# Altium PCB pcb.PcbDoc (part 4 of 6)
Units mm, origin at the board's own origin, x right, y up, seen from the top; angles counter-clockwise.
Board outline 85.44 x 182.72 mm, 2 copper layers (Top Layer, Bottom Layer); 68 components, 54 nets, 232 pads, 184 vias.
Unrouted connection lines stored in the file: 53.
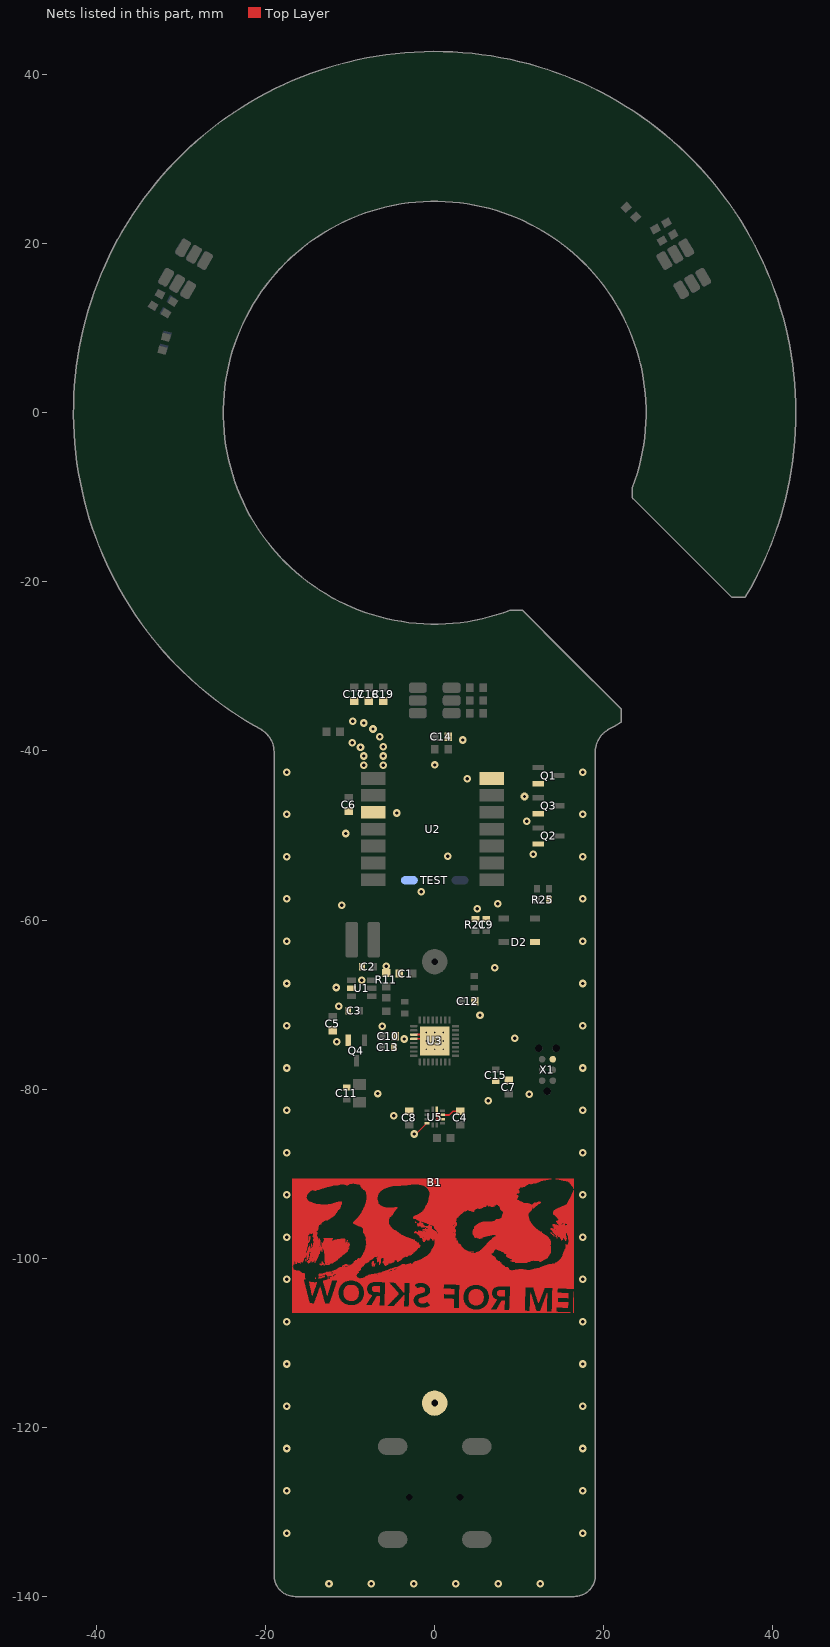
[diagram p4: the nets of this part, all layers, seen from the top]

## Via types
v1: diameter 0.9, hole 0.4, Top Layer to Bottom Layer, 143 vias
v2: diameter 1.27, hole 0.7, Top Layer to Bottom Layer, 32 vias
v3: diameter 0.5, hole 0.2, Top Layer to Bottom Layer, 9 vias

## Nets (pads, with @x,y where several pads share a name; then routed paths per layer and width w, separated by ;. In a path a pad name is that pad's centre, name@x,y a point inside that pad or via, vN(x,y) a via of type N, cw(c..) or ccw(c..) an arc to the next point about the centre after c; other vN are vias at no path point) (continued)
GND: (continued)
  Top Layer w0.025: -4.618,-102.886 -3.577,-102.886 ; -4.593,-105.401 -3.653,-105.401 ; -4.593,-102.911 -3.577,-102.911 ; -4.593,-100.143 -4.542,-100.143 ; -4.593,-100.117 -4.008,-100.117 ; -4.593,-100.092 -3.983,-100.092 ; -4.567,-105.375 -3.653,-105.375 ; -4.567,-102.937 -3.577,-102.937 ; -4.542,-105.35 -3.653,-105.35 ; -4.542,-102.962 -3.577,-102.962 ; -4.542,-101.337 8.819,-101.337 ; -4.542,-101.235 -4.212,-101.235 ; -4.516,-105.324 -3.653,-105.324 ; -4.516,-102.988 -3.577,-102.988 ; -4.516,-101.311 8.768,-101.311 ; -4.516,-101.286 8.717,-101.286 ; -4.516,-101.26 8.692,-101.26 ; -4.491,-105.299 -3.653,-105.299 ; -4.491,-103.013 -3.577,-103.013 ; -4.491,-101.083 8.387,-101.083 ; -4.491,-101.057 8.361,-101.057 ; -4.466,-105.274 -3.653,-105.274 ; -4.466,-103.064 -3.577,-103.064 ; -4.466,-103.038 -3.577,-103.038 ; -4.466,-101.108 -4.415,-101.108 ; -4.466,-100.143 -4.034,-100.143 ; -4.44,-105.248 -3.653,-105.248 ; -4.44,-103.089 -3.577,-103.089 ; -4.44,-101.032 8.336,-101.032 ; -4.415,-105.223 -3.653,-105.223 ; -4.415,-103.115 -3.577,-103.115 ; -4.415,-100.371 -4.389,-100.371 ; -4.415,-100.346 -4.364,-100.346 ; -4.415,-100.321 -4.339,-100.321 ; -4.415,-100.295 -4.288,-100.295 ; -4.415,-100.27 -4.237,-100.27 ; -4.415,-100.168 -4.059,-100.168 ; -4.389,-105.197 -3.653,-105.197 ; -4.389,-103.14 -3.577,-103.14 ; -4.389,-101.108 8.412,-101.108 ; -4.389,-100.244 -4.186,-100.244 ; -4.389,-100.194 -4.085,-100.194 ; -4.364,-105.172 -3.653,-105.172 ; -4.364,-103.165 -3.577,-103.165 ; -4.364,-101.006 8.311,-101.006 ; -4.364,-100.219 -4.135,-100.219 ; -4.339,-105.147 -3.653,-105.147 ; -4.339,-105.121 -3.653,-105.121 ; -4.339,-103.191 -3.577,-103.191 ; -4.339,-101.133 -4.313,-101.133 ; -4.313,-105.096 -3.653,-105.096 ; -4.313,-103.242 -3.577,-103.242 ; -4.313,-103.216 -3.577,-103.216 ; -4.313,-100.981 8.285,-100.981 ; -4.288,-105.07 -3.653,-105.07 ; -4.288,-103.267 -3.577,-103.267 ; -4.262,-105.045 -3.653,-105.045 ; -4.262,-103.292 -3.577,-103.292 ; -4.262,-100.956 8.285,-100.956 ; -4.237,-105.02 -3.653,-105.02 ; -4.237,-103.318 -3.577,-103.318 ; -4.212,-104.994 -3.653,-104.994 ; -4.212,-103.343 -3.577,-103.343 ; -4.212,-100.93 8.26,-100.93 ; -4.186,-104.969 -3.627,-104.969 ; -4.186,-103.369 -3.577,-103.369 ; -4.186,-101.235 8.641,-101.235 ; -4.186,-101.21 8.59,-101.21 ; -4.186,-101.184 8.539,-101.184 ; -4.186,-101.159 8.488,-101.159 ; -4.186,-101.133 8.463,-101.133 ; -4.161,-104.943 -3.627,-104.943 ; -4.161,-103.394 -3.577,-103.394 ; -4.161,-100.905 8.234,-100.905 ; -4.135,-104.918 -3.627,-104.918 ; -4.135,-103.445 -3.577,-103.445 ; -4.135,-103.419 -3.577,-103.419 ; -4.135,-100.879 8.209,-100.879 ; -4.11,-104.893 -3.627,-104.893 ; -4.11,-103.47 -3.577,-103.47 ; -4.085,-104.867 -3.627,-104.867 ; -4.085,-103.496 -3.577,-103.496 ; -4.085,-100.854 8.158,-100.854 ; -4.059,-104.842 -3.627,-104.842 ; -4.059,-104.816 -3.627,-104.816 ; -4.059,-103.521 -3.602,-103.521 ; -4.034,-104.791 -3.627,-104.791 ; -4.034,-103.546 -3.602,-103.546 ; -4.034,-100.829 8.133,-100.829 ; -4.008,-104.766 -3.627,-104.766 ; -4.008,-103.572 -3.602,-103.572 ; -3.983,-104.74 -3.627,-104.74 ; -3.983,-103.597 -3.602,-103.597 ; -3.983,-100.803 8.082,-100.803 ; -3.958,-104.715 -3.627,-104.715 ; -3.958,-103.648 -3.602,-103.648 ; -3.958,-103.623 -3.602,-103.623 ; -3.958,-100.778 8.031,-100.778 ; -3.932,-104.689 -3.627,-104.689 ; -3.932,-103.673 -3.602,-103.673 ; -3.907,-104.664 -3.627,-104.664 ; -3.907,-103.699 -3.602,-103.699 ; -3.907,-100.752 -3.526,-100.752 ; -3.881,-104.639 -3.627,-104.639 ; -3.881,-103.724 -3.602,-103.724 ; -3.856,-104.613 -3.627,-104.613 ; -3.856,-103.75 -3.602,-103.75 ; -3.856,-100.727 -3.551,-100.727 ; -3.831,-104.588 -3.627,-104.588 ; -3.831,-103.775 -3.602,-103.775 ; -3.805,-104.562 -3.627,-104.562 ; -3.805,-103.8 -3.602,-103.8 ; -3.805,-100.702 -3.551,-100.702 ; -3.78,-104.537 -3.627,-104.537 ; -3.78,-103.851 -3.602,-103.851 ; -3.78,-103.826 -3.602,-103.826 ; -3.754,-104.512 -3.627,-104.512 ; -3.754,-104.486 -3.627,-104.486 ; -3.754,-103.877 -3.602,-103.877 ; -3.729,-104.461 -3.627,-104.461 ; -3.729,-103.902 -3.602,-103.902 ; -3.704,-104.435 -3.627,-104.435 ; -3.704,-103.927 -3.602,-103.927 ; -3.678,-104.41 -3.627,-104.41 ; -3.678,-103.953 -3.602,-103.953 ; -3.653,-104.385 -3.627,-104.385 ; -3.653,-103.978 -3.602,-103.978 ; -3.627,-104.004 -3.602,-104.004 ; -3.627,-100.676 -3.577,-100.676 ; -3.424,-100.752 8.006,-100.752 ; -3.348,-99.762 -3.323,-99.762 ; -3.348,-99.736 -3.297,-99.736 ; -3.348,-99.711 -3.246,-99.711 ; -3.323,-100.727 7.955,-100.727 ; -3.297,-102.861 -1.824,-102.861 ; -3.297,-99.787 -3.272,-99.787 ; -3.246,-100.702 7.93,-100.702 ; -3.196,-100.676 7.879,-100.676 ; -3.094,-100.651 -2.764,-100.651 ; -3.043,-105.705 -2.053,-105.705 ; -3.043,-105.68 -2.103,-105.68 ; -3.043,-105.655 -2.129,-105.655 ; -3.043,-105.629 -2.18,-105.629 ; -3.043,-105.604 -2.205,-105.604 ; -3.043,-105.578 -2.23,-105.578 ; -3.043,-105.553 -2.256,-105.553 ; -3.018,-105.528 -2.281,-105.528 ; -3.018,-105.502 -2.307,-105.502 ; -3.018,-105.477 -2.332,-105.477 ; -3.018,-105.451 -2.357,-105.451 ; -3.018,-105.426 -2.357,-105.426 ; -3.018,-105.401 -2.383,-105.401 ; -3.018,-105.375 -2.408,-105.375 ; -3.018,-105.35 -2.408,-105.35 ; -3.018,-105.324 -2.434,-105.324 ; -3.018,-105.299 -2.434,-105.299 ; -3.018,-105.274 -2.459,-105.274 ; -3.018,-105.248 -2.459,-105.248 ; -3.018,-105.223 -2.459,-105.223 ; -3.018,-105.197 -2.484,-105.197 ; -3.018,-105.172 -2.484,-105.172 ; -3.018,-105.147 -2.484,-105.147 ; -3.018,-105.121 -2.484,-105.121 ; -3.018,-105.096 -2.51,-105.096 ; -3.018,-105.07 -2.51,-105.07 ; -3.018,-105.045 -2.51,-105.045 ; -3.018,-105.02 -2.51,-105.02 ; -3.018,-104.994 -2.51,-104.994 ; -3.018,-104.969 -2.51,-104.969 ; -3.018,-104.943 -2.51,-104.943 ; -3.018,-104.918 -2.51,-104.918 ; -3.018,-104.893 -2.51,-104.893 ; -3.018,-104.867 -2.51,-104.867 ; -3.018,-104.842 -2.51,-104.842 ; -3.018,-104.816 -2.51,-104.816 ; -2.992,-104.791 -2.51,-104.791 ; -2.992,-104.766 -2.51,-104.766 ; -2.992,-104.74 -2.51,-104.74 ; -2.992,-104.715 -2.484,-104.715 ; -2.992,-104.689 -2.484,-104.689 ; -2.992,-104.664 -2.484,-104.664 ; -2.992,-104.639 -2.484,-104.639 ; -2.992,-104.613 -2.459,-104.613 ; -2.992,-104.588 -2.459,-104.588 ; -2.992,-104.562 -2.459,-104.562 ; -2.992,-104.537 -2.434,-104.537 ; -2.992,-104.512 -2.434,-104.512 ; -2.992,-104.486 -2.408,-104.486 ; -2.992,-104.461 -2.383,-104.461 ; -2.992,-104.435 -2.357,-104.435 ; -2.992,-104.41 -2.357,-104.41 ; -2.992,-104.385 -2.332,-104.385 ; -2.992,-104.359 -2.307,-104.359 ; -2.992,-104.334 -2.256,-104.334 ; -2.992,-104.308 -2.23,-104.308 ; -2.992,-104.283 -2.205,-104.283 ; -2.992,-104.258 -2.154,-104.258 ; -2.992,-104.232 -2.103,-104.232 ; -2.992,-104.207 -2.053,-104.207 ; -2.992,-104.181 -2.002,-104.181 ; -2.992,-104.156 -1.926,-104.156 ; -2.992,-104.131 -1.849,-104.131 ; -2.992,-104.105 -1.748,-104.105 ; -2.967,-104.08 -1.646,-104.08 ; -2.967,-104.054 -1.57,-104.054 ; -2.967,-104.029 -1.468,-104.029 ; -2.967,-104.004 -1.392,-104.004 ; -2.967,-103.978 -1.341,-103.978 ; -2.967,-103.953 -1.291,-103.953 ; -2.967,-103.927 -1.265,-103.927 ; -2.967,-103.902 -1.214,-103.902 ; -2.967,-103.877 -1.214,-103.877 ; -2.967,-103.851 -1.189,-103.851 ; -2.967,-103.826 -1.189,-103.826 ; -2.967,-103.8 -1.164,-103.8 ; -2.967,-103.775 -1.164,-103.775 ; -2.967,-103.75 -1.164,-103.75 ; -2.967,-103.724 -1.164,-103.724 ; -2.967,-103.699 -1.164,-103.699 ; -2.967,-103.673 -1.164,-103.673 ; -2.967,-103.648 -1.164,-103.648 ; -2.967,-103.623 -1.189,-103.623 ; -2.967,-103.597 -1.189,-103.597 ; -2.967,-103.572 -2.053,-103.572 ; -2.967,-103.546 -2.078,-103.546 ; -2.967,-103.521 -2.103,-103.521 ; -2.967,-103.496 -2.129,-103.496 ; -2.967,-103.47 -2.154,-103.47 ; -2.967,-103.445 -2.18,-103.445 ; -2.967,-103.419 -2.18,-103.419 ; -2.967,-103.394 -2.205,-103.394 ; -2.967,-103.369 -2.23,-103.369 ; -2.942,-103.343 -2.256,-103.343 ; -2.942,-103.318 -2.281,-103.318 ; -2.942,-103.292 -2.307,-103.292 ; -2.942,-103.267 -2.332,-103.267 ; -2.942,-103.242 -2.332,-103.242 ; -2.942,-103.216 -2.357,-103.216 ; -2.942,-103.191 -2.383,-103.191 ; -2.942,-103.165 -2.408,-103.165 ; -2.942,-103.14 -2.434,-103.14 ; -2.942,-103.115 -2.434,-103.115 ; -2.942,-103.089 -2.408,-103.089 ; -2.942,-103.064 -2.383,-103.064 ; -2.942,-103.038 -2.332,-103.038 ; -2.942,-103.013 -2.307,-103.013 ; -2.942,-102.988 -2.256,-102.988 ; -2.942,-102.962 -2.205,-102.962 ; -2.942,-102.937 -2.154,-102.937 ; -2.942,-102.911 -2.078,-102.911 ; -2.942,-102.886 -1.976,-102.886 ; -2.942,-100.625 -2.789,-100.625 ; -2.916,-99.559 -2.84,-99.559 ; -2.865,-100.6 -2.815,-100.6 ; -2.637,-100.651 7.879,-100.651 ; -2.586,-100.625 7.853,-100.625 ; -2.535,-100.6 7.879,-100.6 ; -2.535,-95.19 2.596,-95.19 ; -2.535,-95.164 2.621,-95.164 ; -2.535,-95.139 2.672,-95.139 ; -2.51,-100.575 7.879,-100.575 ; -2.51,-100.549 7.853,-100.549 ; -2.51,-95.215 2.596,-95.215 ; -2.51,-95.114 2.773,-95.114 ; -2.484,-100.524 7.828,-100.524 ; -2.484,-100.498 7.777,-100.498 ; -2.484,-100.473 7.752,-100.473 ; -2.484,-95.241 2.57,-95.241 ; -2.484,-95.088 2.773,-95.088 ; -2.459,-100.448 7.726,-100.448 ; -2.459,-95.063 2.799,-95.063 ; -2.434,-98.06 -2.154,-98.06 ; -2.434,-96.892 -2.18,-96.892 ; -2.434,-95.266 2.57,-95.266 ; -2.408,-100.422 7.701,-100.422 ; -2.408,-96.942 -2.256,-96.942 ; -2.408,-96.917 -2.205,-96.917 ; -2.408,-95.037 2.799,-95.037 ; -2.383,-98.035 -2.18,-98.035 ; -2.383,-96.993 -2.332,-96.993 ; -2.383,-96.968 -2.307,-96.968 ; -2.383,-95.012 2.799,-95.012 ; -2.357,-100.397 7.701,-100.397 ; -2.357,-94.987 2.824,-94.987 ; -2.332,-98.009 -2.205,-98.009 ; -2.332,-96.866 -2.18,-96.866 ; -2.307,-100.371 7.676,-100.371 ; -2.307,-96.841 -2.18,-96.841 ; -2.307,-96.815 -2.205,-96.815 ; -2.307,-95.698 -2.23,-95.698 ; -2.307,-94.961 2.85,-94.961 ; -2.281,-96.79 -2.23,-96.79 ; -2.281,-95.723 -2.154,-95.723 ; -2.256,-95.749 -2.154,-95.749 ; -2.256,-95.291 2.57,-95.291 ; -2.256,-94.936 2.85,-94.936 ; -2.23,-100.346 7.599,-100.346 ; -2.205,-95.774 -2.18,-95.774 ; -2.205,-95.317 2.57,-95.317 ; -2.205,-94.91 2.875,-94.91 ; -2.154,-100.321 7.523,-100.321 ; -2.154,-96.993 -1.164,-96.993 ; -2.154,-96.968 -1.24,-96.968 ; -2.154,-95.342 2.57,-95.342 ; -2.129,-96.942 -1.24,-96.942 ; -2.129,-95.368 2.57,-95.368 ; -2.129,-94.885 2.9,-94.885 ; -2.103,-96.917 -1.214,-96.917 ; -2.103,-96.892 -1.265,-96.892 ; -2.078,-100.295 7.472,-100.295 ; -2.078,-97.019 -0.833,-97.019 ; -2.078,-96.003 -1.875,-96.003 ; -2.078,-95.977 -1.849,-95.977 ; -2.078,-95.952 -1.799,-95.952 ; -2.078,-95.926 -1.367,-95.926 ; -2.078,-95.393 2.57,-95.393 ; -2.078,-94.86 2.926,-94.86 ; -2.053,-96.028 -1.9,-96.028 ; -2.053,-95.901 -1.367,-95.901 ; -2.027,-97.12 0.31,-97.12 ; -2.027,-96.053 -1.875,-96.053 ; -2.027,-95.876 -2.002,-95.876 ; -2.027,-95.418 2.57,-95.418 ; -2.027,-91.202 11.003,-91.202 ; -2.002,-103.572 -1.214,-103.572 ; -2.002,-100.27 -1.926,-100.27 ; -2.002,-96.104 -1.824,-96.104 ; -2.002,-96.079 -1.849,-96.079 ; -2.002,-94.834 2.951,-94.834 ; -1.976,-103.546 -1.24,-103.546 ; -1.976,-97.146 0.31,-97.146 ; -1.976,-96.13 -1.824,-96.13 ; -1.976,-95.444 2.545,-95.444 ; -1.951,-103.521 -1.265,-103.521 ; -1.951,-98.644 -1.773,-98.644 ; -1.951,-97.171 0.411,-97.171 ; -1.951,-97.044 -0.783,-97.044 ; -1.951,-96.739 -1.799,-96.739 ; -1.951,-96.714 -1.799,-96.714 ; -1.951,-94.809 2.977,-94.809 ; -1.926,-98.695 -1.824,-98.695 ; -1.926,-98.67 -1.799,-98.67 ; -1.926,-97.095 0.284,-97.095 ; -1.926,-96.79 -1.824,-96.79 ; -1.926,-96.765 -1.824,-96.765 ; -1.926,-96.155 -1.799,-96.155 ; -1.926,-95.469 2.545,-95.469 ; -1.9,-104.969 2.265,-104.969 ; -1.9,-103.496 -1.316,-103.496 ; -1.9,-98.72 -1.875,-98.72 ; -1.9,-97.196 0.437,-97.196 ; -1.9,-96.815 -1.545,-96.815 ; -1.9,-95.495 2.367,-95.495 ; -1.9,-94.783 3.027,-94.783 ; -1.875,-105.07 -0.96,-105.07 ; -1.875,-105.045 -0.935,-105.045 ; -1.875,-105.02 2.265,-105.02 ; -1.875,-104.994 2.265,-104.994 ; -1.875,-104.943 2.265,-104.943 ; -1.875,-104.918 2.265,-104.918 ; -1.875,-104.893 2.265,-104.893 ; -1.875,-104.867 2.265,-104.867 ; -1.875,-100.27 7.447,-100.27 ; -1.875,-100.244 7.422,-100.244 ; -1.875,-97.069 -0.757,-97.069 ; -1.875,-96.866 -1.341,-96.866 ; -1.875,-96.841 -1.519,-96.841 ; -1.875,-95.876 -1.443,-95.876 ; -1.875,-95.52 2.342,-95.52 ; -1.849,-105.096 -0.986,-105.096 ; -1.849,-104.842 2.265,-104.842 ; -1.849,-104.816 2.265,-104.816 ; -1.849,-100.219 7.371,-100.219 ; -1.849,-100.194 -1.824,-100.194 ; -1.849,-97.222 0.437,-97.222 ; -1.849,-95.85 -1.468,-95.85 ; -1.849,-95.825 -1.494,-95.825 ; -1.849,-94.758 3.053,-94.758 ; -1.824,-105.147 -1.037,-105.147 ; -1.824,-105.121 -1.011,-105.121 ; -1.824,-104.791 2.062,-104.791 ; -1.824,-103.47 -1.367,-103.47 ; -1.824,-94.733 3.078,-94.733 ; -1.824,-91.227 10.978,-91.227 ; -1.799,-104.766 1.326,-104.766 ; -1.799,-97.247 2.443,-97.247 ; -1.799,-96.079 -1.341,-96.079 ; -1.773,-105.172 -1.087,-105.172 ; -1.773,-98.441 -1.748,-98.441 ; -1.773,-97.45 -1.468,-97.45 ; -1.773,-97.425 -1.57,-97.425 ; -1.773,-97.4 -1.621,-97.4 ; -1.773,-96.053 -1.341,-96.053 ; -1.773,-95.545 2.342,-95.545 ; -1.773,-94.707 3.104,-94.707 ; -1.748,-105.197 -1.113,-105.197 ; -1.748,-104.74 1.072,-104.74 ; -1.748,-97.476 -1.443,-97.476 ; -1.748,-97.273 2.418,-97.273 ; -1.748,-95.672 -1.722,-95.672 ; -1.748,-94.682 3.129,-94.682 ; -1.722,-103.445 -1.468,-103.445 ; -1.722,-100.194 7.345,-100.194 ; -1.722,-97.501 -1.418,-97.501 ; -1.722,-96.79 -1.595,-96.79 ; -1.722,-96.714 -1.697,-96.714 ; -1.722,-95.698 -1.646,-95.698 ; -1.697,-105.223 -1.189,-105.223 ; -1.697,-104.715 1.072,-104.715 ; -1.697,-97.527 -1.392,-97.527 ; -1.697,-97.298 2.418,-97.298 ; -1.697,-95.952 -1.341,-95.952 ; -1.697,-94.656 3.18,-94.656 ; -1.672,-96.104 -1.316,-96.104 ; -1.672,-95.977 -1.341,-95.977 ; -1.672,-94.631 3.205,-94.631 ; -1.672,-91.253 10.952,-91.253 ; -1.646,-104.689 1.072,-104.689 ; -1.646,-100.168 7.32,-100.168 ; -1.646,-97.323 2.418,-97.323 ; -1.621,-105.248 -1.265,-105.248 ; -1.621,-100.143 7.269,-100.143 ; -1.621,-96.206 -1.595,-96.206 ; -1.621,-96.13 -1.341,-96.13 ; -1.621,-96.028 -1.341,-96.028 ; -1.621,-96.003 -1.341,-96.003 ; -1.621,-95.571 2.342,-95.571 ; -1.621,-94.606 3.231,-94.606 ; -1.595,-104.664 1.097,-104.664 ; -1.595,-96.231 -1.468,-96.231 ; -1.595,-94.58 3.256,-94.58 ; -1.57,-100.117 7.244,-100.117 ; -1.57,-97.349 2.392,-97.349 ; -1.57,-96.257 -1.392,-96.257 ; -1.57,-96.155 -1.418,-96.155 ; -1.57,-94.555 3.281,-94.555 ; -1.545,-100.092 7.218,-100.092 ; -1.545,-94.529 3.332,-94.529 ; -1.545,-91.278 10.901,-91.278 ; -1.519,-104.639 1.097,-104.639 ; -1.519,-97.374 2.392,-97.374 ; -1.519,-95.596 2.342,-95.596 ; -1.494,-100.067 7.218,-100.067 ; -1.494,-94.504 3.358,-94.504 ; -1.468,-97.628 -1.392,-97.628 ; -1.468,-94.479 3.383,-94.479 ; -1.443,-104.613 1.097,-104.613 ; -1.443,-100.041 7.244,-100.041 ; -1.443,-97.806 -1.392,-97.806 ; -1.443,-97.781 -1.418,-97.781 ; -1.443,-97.679 -1.011,-97.679 ; -1.443,-97.654 -0.935,-97.654 ; -1.443,-97.4 -0.198,-97.4 ; -1.443,-95.622 2.342,-95.622 ; -1.443,-94.453 3.408,-94.453 ; -1.443,-91.304 10.851,-91.304 ; -1.418,-102.861 16.464,-102.861 ; -1.418,-100.016 7.244,-100.016 ; -1.418,-97.831 -1.367,-97.831 ; -1.418,-97.704 -1.011,-97.704 ; -1.418,-94.428 3.459,-94.428 ; -1.392,-97.857 -1.341,-97.857 ; -1.392,-97.73 -1.011,-97.73 ; -1.392,-97.425 -0.198,-97.425 ; -1.392,-96.765 -1.341,-96.765 ; -1.392,-96.612 -1.113,-96.612 ; -1.392,-96.587 -1.189,-96.587 ; -1.392,-96.282 -1.214,-96.282 ; -1.392,-94.402 3.485,-94.402 ; -1.367,-99.99 7.218,-99.99 ; -1.367,-97.933 -1.164,-97.933 ; -1.367,-97.908 -1.265,-97.908 ; -1.367,-97.882 -1.291,-97.882 ; -1.367,-97.628 -0.935,-97.628 ; -1.367,-96.79 -1.24,-96.79 ; -1.367,-96.561 -1.265,-96.561 ; -1.367,-95.647 2.367,-95.647 ; -1.367,-94.377 3.637,-94.377 ; -1.367,-91.329 10.825,-91.329 ; -1.341,-104.588 1.097,-104.588 ; -1.341,-97.958 -1.164,-97.958 ; -1.341,-97.755 -1.087,-97.755 ; -1.341,-97.603 -0.757,-97.603 ; -1.341,-96.257 -1.164,-96.257 ; -1.341,-94.352 3.688,-94.352 ; -1.316,-99.965 7.218,-99.965 ; -1.316,-97.984 -1.164,-97.984 ; -1.316,-97.781 -1.087,-97.781 ; -1.316,-97.577 -0.757,-97.577 ; -1.316,-97.45 -0.859,-97.45 ; -1.316,-95.672 2.469,-95.672 ; -1.316,-94.326 3.739,-94.326 ; -1.316,-91.354 10.774,-91.354 ; -1.291,-102.886 16.464,-102.886 ; -1.291,-99.94 7.168,-99.94 ; -1.291,-97.806 -1.087,-97.806 ; -1.291,-97.552 -0.783,-97.552 ; -1.291,-96.231 -0.325,-96.231 ; -1.291,-96.155 -1.24,-96.155 ; -1.291,-94.301 3.764,-94.301 ; -1.291,-94.275 3.815,-94.275 ; -1.265,-104.562 1.097,-104.562 ; -1.265,-98.009 -1.164,-98.009 ; -1.265,-97.831 -1.113,-97.831 ; -1.265,-97.527 -0.833,-97.527 ; -1.265,-97.501 -0.833,-97.501 ; -1.265,-97.476 -0.859,-97.476 ; -1.265,-96.206 -1.011,-96.206 ; -1.265,-96.18 -1.164,-96.18 ; -1.265,-94.25 3.84,-94.25 ; -1.24,-99.914 7.142,-99.914 ; -1.24,-97.882 -1.138,-97.882 ; -1.24,-97.857 -1.138,-97.857 ; -1.24,-96.815 -1.164,-96.815 ; -1.24,-96.638 -1.011,-96.638 ; -1.24,-95.698 2.443,-95.698 ; -1.24,-94.225 3.891,-94.225 ; -1.24,-91.38 10.749,-91.38 ; -1.214,-99.889 7.117,-99.889 ; -1.214,-97.908 -1.164,-97.908 ; -1.214,-94.199 4.704,-94.199 ; -1.214,-94.174 4.755,-94.174 ; -1.189,-102.911 16.464,-102.911 ; -1.189,-96.841 -1.087,-96.841 ; -1.189,-94.148 4.805,-94.148 ; -1.189,-94.123 4.856,-94.123 ; -1.189,-91.405 10.724,-91.405 ; -1.164,-104.537 1.097,-104.537 ; -1.164,-99.863 7.091,-99.863 ; -1.164,-96.866 -0.986,-96.866 ; -1.164,-96.663 -0.122,-96.663 ; -1.164,-95.723 2.443,-95.723 ; -1.164,-94.098 4.907,-94.098 ; -1.164,-94.072 4.958,-94.072 ; -1.164,-91.431 10.698,-91.431 ; -1.138,-96.892 -0.935,-96.892 ; -1.138,-96.511 -1.011,-96.511 ; -1.138,-96.485 -1.037,-96.485 ; -1.138,-96.46 -1.062,-96.46 ; -1.138,-94.047 4.983,-94.047 ; -1.138,-94.021 5.517,-94.021 ; -1.138,-93.996 5.567,-93.996 ; -1.113,-105.832 2.24,-105.832 ; -1.113,-102.937 16.464,-102.937 ; -1.113,-99.838 7.066,-99.838 ; -1.113,-96.917 -0.935,-96.917 ; -1.113,-96.536 -0.986,-96.536 ; -1.113,-93.971 5.618,-93.971 ; -1.113,-93.945 5.034,-93.945 ; -1.113,-93.92 5.034,-93.92 ; -1.113,-91.456 10.673,-91.456 ; -1.087,-104.512 1.097,-104.512 ; -1.087,-96.993 -0.884,-96.993 ; -1.087,-96.942 -0.91,-96.942 ; -1.087,-96.688 -0.071,-96.688 ; -1.087,-93.894 5.745,-93.894 ; -1.087,-93.869 4.678,-93.869 ; -1.062,-102.962 16.464,-102.962 ; -1.062,-99.813 7.041,-99.813 ; -1.062,-96.968 -0.91,-96.968 ; -1.062,-96.561 -0.91,-96.561 ; -1.062,-96.257 -0.351,-96.257 ; -1.062,-95.749 2.418,-95.749 ; -1.062,-93.844 6.05,-93.844 ; -1.062,-93.818 6.05,-93.818 ; -1.062,-91.481 10.622,-91.481 ; -1.037,-96.714 -0.046,-96.714 ; -1.037,-93.793 5.796,-93.793 ; -1.037,-91.507 10.571,-91.507 ; -1.011,-105.807 2.24,-105.807 ; -1.011,-104.486 1.097,-104.486 ; -1.011,-102.988 16.464,-102.988 ; -1.011,-99.787 7.015,-99.787 ; -1.011,-96.587 -0.808,-96.587 ; -1.011,-96.358 -0.96,-96.358 ; -1.011,-93.767 6.075,-93.767 ; -1.011,-93.742 6.075,-93.742 ; -1.011,-91.532 10.393,-91.532 ; -0.986,-97.679 -0.935,-97.679 ; -0.986,-96.282 -0.376,-96.282 ; -0.986,-93.717 6.075,-93.717 ; -0.96,-104.461 1.097,-104.461 ; -0.96,-103.013 1.046,-103.013 ; -0.96,-99.762 6.964,-99.762 ; -0.96,-96.739 0.005,-96.739 ; -0.96,-96.612 -0.732,-96.612 ; -0.96,-95.774 2.367,-95.774 ; -0.96,-93.691 6.075,-93.691 ; -0.96,-93.666 6.075,-93.666 ; -0.96,-91.558 10.089,-91.558 ; -0.935,-96.815 0.132,-96.815 ; -0.935,-96.79 0.081,-96.79 ; -0.935,-96.765 0.03,-96.765 ; -0.935,-96.638 -0.173,-96.638 ; -0.935,-95.799 2.342,-95.799 ; -0.935,-93.64 6.075,-93.64 ; -0.935,-91.583 10.063,-91.583 ; -0.91,-105.782 2.24,-105.782 ; -0.91,-104.435 1.097,-104.435 ; -0.91,-103.038 1.046,-103.038 ; -0.91,-99.736 6.914,-99.736 ; -0.91,-97.628 -0.757,-97.628 ; -0.91,-95.825 2.316,-95.825 ; -0.91,-93.615 6.075,-93.615 ; -0.91,-91.608 10.038,-91.608 ; -0.884,-105.045 2.265,-105.045 ; -0.884,-103.064 1.046,-103.064 ; -0.884,-99.711 6.837,-99.711 ; -0.884,-97.755 -0.783,-97.755 ; -0.884,-96.841 0.183,-96.841 ; -0.884,-96.307 -0.376,-96.307 ; -0.884,-93.59 6.075,-93.59 ; -0.884,-93.564 7.32,-93.564 ; -0.884,-91.634 10.038,-91.634 ; -0.859,-105.07 2.265,-105.07 ; -0.859,-104.41 1.097,-104.41 ; -0.859,-97.781 -0.783,-97.781 ; -0.859,-97.73 -0.783,-97.73 ; -0.859,-97.704 -0.757,-97.704 ; -0.859,-97.679 -0.757,-97.679 ; -0.859,-97.654 -0.757,-97.654 ; -0.859,-96.866 0.208,-96.866 ; -0.859,-95.85 2.316,-95.85 ; -0.859,-93.539 11.155,-93.539 ; -0.859,-93.513 11.054,-93.513 ; -0.859,-91.659 10.012,-91.659 ; -0.833,-105.756 2.24,-105.756 ; -0.833,-105.121 2.265,-105.121 ; -0.833,-105.096 2.265,-105.096 ; -0.833,-104.385 1.097,-104.385 ; -0.833,-103.089 1.046,-103.089 ; -0.833,-99.686 6.812,-99.686 ; -0.833,-96.892 0.208,-96.892 ; -0.833,-96.511 -0.325,-96.511 ; -0.833,-96.485 -0.325,-96.485 ; -0.833,-96.333 -0.376,-96.333 ; -0.833,-93.488 10.597,-93.488 ; -0.833,-93.463 10.52,-93.463 ; -0.833,-91.71 9.987,-91.71 ; -0.833,-91.685 10.012,-91.685 ; -0.808,-105.147 2.265,-105.147 ; -0.808,-103.115 1.046,-103.115 ; -0.808,-99.66 6.787,-99.66 ; -0.808,-97.45 -0.198,-97.45 ; -0.808,-96.384 -0.351,-96.384 ; -0.808,-96.358 -0.351,-96.358 ; -0.808,-93.437 10.47,-93.437 ; -0.808,-93.412 10.444,-93.412 ; -0.808,-91.735 9.962,-91.735 ; -0.783,-105.731 2.24,-105.731 ; -0.783,-105.172 2.265,-105.172 ; -0.783,-104.359 1.097,-104.359 ; -0.783,-103.14 1.046,-103.14 ; -0.783,-99.635 6.761,-99.635 ; -0.783,-97.476 -0.554,-97.476 ; -0.783,-96.46 -0.325,-96.46 ; -0.783,-96.434 -0.351,-96.434 ; -0.783,-96.409 -0.351,-96.409 ; -0.783,-93.386 10.393,-93.386 ; -0.783,-93.361 10.343,-93.361 ; -0.783,-93.336 10.317,-93.336 ; -0.783,-93.31 10.266,-93.31 ; -0.783,-91.761 9.936,-91.761 ; -0.757,-105.197 2.265,-105.197 ; -0.757,-104.334 1.097,-104.334 ; -0.757,-103.165 1.046,-103.165 ; -0.757,-99.609 6.761,-99.609 ; -0.757,-97.501 -0.554,-97.501 ; -0.757,-96.917 0.208,-96.917 ; -0.757,-96.587 -0.706,-96.587 ; -0.757,-96.536 -0.3,-96.536 ; -0.757,-96.206 -0.351,-96.206 ; -0.757,-96.18 -0.63,-96.18 ; -0.757,-93.285 10.19,-93.285 ; -0.757,-93.259 10.139,-93.259 ; -0.757,-93.234 10.063,-93.234 ; -0.757,-93.209 10.012,-93.209 ; -0.757,-91.812 9.86,-91.812 ; -0.757,-91.786 9.911,-91.786 ; -0.732,-105.705 2.24,-105.705 ; -0.732,-105.223 2.265,-105.223 ; -0.732,-104.308 1.097,-104.308 ; -0.732,-103.191 1.046,-103.191 ; -0.732,-99.584 6.736,-99.584 ; -0.732,-97.704 -0.681,-97.704 ; -0.732,-97.527 -0.529,-97.527 ; -0.732,-96.942 0.233,-96.942 ; -0.732,-96.561 -0.656,-96.561 ; -0.732,-96.155 -0.656,-96.155 ; -0.732,-96.13 -0.681,-96.13 ; -0.732,-93.183 9.962,-93.183 ; -0.732,-93.158 9.911,-93.158 ; -0.732,-93.132 9.885,-93.132 ; -0.732,-93.107 9.835,-93.107 ; -0.732,-91.862 9.733,-91.862 ; -0.732,-91.837 9.758,-91.837 ; -0.706,-105.248 2.265,-105.248 ; -0.706,-104.283 1.097,-104.283 ; -0.706,-103.216 1.046,-103.216 ; -0.706,-99.559 6.71,-99.559 ; -0.706,-97.755 -0.656,-97.755 ; -0.706,-97.73 -0.656,-97.73 ; -0.706,-97.577 -0.554,-97.577 ; -0.706,-97.552 -0.529,-97.552 ; -0.706,-97.069 0.284,-97.069 ; -0.706,-97.044 0.284,-97.044 ; -0.706,-97.019 0.259,-97.019 ; -0.706,-96.993 0.259,-96.993 ; -0.706,-96.968 0.233,-96.968 ; -0.706,-96.028 -0.63,-96.028 ; -0.706,-95.876 2.291,-95.876 ; -0.706,-93.082 9.784,-93.082 ; -0.706,-93.056 9.758,-93.056 ; -0.706,-93.031 9.708,-93.031 ; -0.706,-93.005 9.657,-93.005 ; -0.706,-92.98 9.631,-92.98 ; -0.706,-91.913 9.86,-91.913 ; -0.706,-91.888 9.784,-91.888 ; -0.681,-105.68 2.24,-105.68 ; -0.681,-105.299 2.265,-105.299 ; -0.681,-105.274 2.265,-105.274 ; -0.681,-104.258 1.097,-104.258 ; -0.681,-103.267 1.046,-103.267 ; -0.681,-103.242 1.046,-103.242 ; -0.681,-99.533 6.66,-99.533 ; -0.681,-97.781 -0.656,-97.781 ; -0.681,-97.603 -0.579,-97.603 ; -0.681,-96.053 -0.605,-96.053 ; -0.681,-92.955 9.606,-92.955 ; -0.681,-92.929 9.606,-92.929 ; -0.681,-92.904 9.657,-92.904 ; -0.681,-92.878 9.708,-92.878 ; -0.681,-92.853 9.784,-92.853 ; -0.681,-91.964 9.936,-91.964 ; -0.681,-91.939 9.911,-91.939 ; -0.656,-105.655 2.24,-105.655 ; -0.656,-105.324 2.24,-105.324 ; -0.656,-104.232 1.097,-104.232 ; -0.656,-103.292 1.046,-103.292 ; -0.656,-99.508 6.66,-99.508 ; -0.656,-97.654 -0.579,-97.654 ; -0.656,-97.628 -0.579,-97.628 ; -0.656,-96.079 -0.579,-96.079 ; -0.656,-92.828 9.835,-92.828 ; -0.656,-92.802 9.809,-92.802 ; -0.656,-92.777 9.784,-92.777 ; -0.656,-92.751 9.784,-92.751 ; -0.656,-92.726 9.809,-92.726 ; -0.656,-92.015 9.962,-92.015 ; -0.656,-91.989 9.962,-91.989 ; -0.63,-105.35 2.24,-105.35 ; -0.63,-104.207 1.097,-104.207 ; -0.63,-103.343 1.046,-103.343 ; -0.63,-103.318 1.046,-103.318 ; -0.63,-99.482 6.71,-99.482 ; -0.63,-97.679 -0.579,-97.679 ; -0.63,-96.612 -0.224,-96.612 ; -0.63,-96.587 -0.249,-96.587 ; -0.63,-96.561 -0.3,-96.561 ; -0.63,-95.901 2.265,-95.901 ; -0.63,-92.701 9.835,-92.701 ; -0.63,-92.675 9.86,-92.675 ; -0.63,-92.65 9.86,-92.65 ; -0.63,-92.624 9.86,-92.624 ; -0.63,-92.091 9.987,-92.091 ; -0.63,-92.066 9.987,-92.066 ; -0.63,-92.04 9.987,-92.04 ; -0.605,-105.629 2.24,-105.629 ; -0.605,-105.375 2.24,-105.375 ; -0.605,-104.181 1.097,-104.181 ; -0.605,-104.156 2.291,-104.156 ; -0.605,-103.369 1.021,-103.369 ; -0.605,-99.457 6.71,-99.457 ; -0.605,-97.704 -0.579,-97.704 ; -0.605,-96.18 -0.376,-96.18 ; -0.605,-96.104 -0.579,-96.104 ; -0.605,-95.926 2.265,-95.926 ; -0.605,-92.599 9.86,-92.599 ; -0.605,-92.574 9.835,-92.574 ; -0.605,-92.548 9.784,-92.548 ; -0.605,-92.523 9.733,-92.523 ; -0.605,-92.497 9.708,-92.497 ; -0.605,-92.167 9.987,-92.167 ; -0.605,-92.142 9.987,-92.142 ; -0.605,-92.116 9.987,-92.116 ; -0.579,-105.604 2.24,-105.604 ; -0.579,-105.401 2.24,-105.401 ; -0.579,-104.131 2.291,-104.131 ; -0.579,-104.105 2.291,-104.105 ; -0.579,-103.445 1.021,-103.445 ; -0.579,-103.419 1.021,-103.419 ; -0.579,-103.394 1.021,-103.394 ; -0.579,-99.432 6.71,-99.432 ; -0.579,-96.155 -0.402,-96.155 ; -0.579,-92.472 9.657,-92.472 ; -0.579,-92.447 9.631,-92.447 ; -0.579,-92.421 9.631,-92.421 ; -0.579,-92.396 9.631,-92.396 ; -0.579,-92.37 9.631,-92.37 ; -0.579,-92.345 9.631,-92.345 ; -0.579,-92.32 9.657,-92.32 ; -0.579,-92.294 9.682,-92.294 ; -0.579,-92.269 9.758,-92.269 ; -0.579,-92.243 9.936,-92.243 ; -0.579,-92.218 9.987,-92.218 ; -0.579,-92.193 9.987,-92.193 ; -0.554,-105.451 2.24,-105.451 ; -0.554,-105.426 2.24,-105.426 ; -0.554,-104.08 2.291,-104.08 ; -0.554,-104.054 2.291,-104.054 ; -0.554,-103.521 1.021,-103.521 ; -0.554,-103.496 1.021,-103.496 ; -0.554,-103.47 1.021,-103.47 ; -0.554,-99.406 4.196,-99.406 ; -0.554,-95.952 2.24,-95.952 ; -0.529,-105.578 2.24,-105.578 ; -0.529,-105.477 2.24,-105.477 ; -0.529,-104.029 2.291,-104.029 ; -0.529,-104.004 2.291,-104.004 ; -0.529,-103.978 2.291,-103.978 ; -0.529,-103.953 2.291,-103.953 ; -0.529,-103.927 2.291,-103.927 ; -0.529,-103.902 2.291,-103.902 ; -0.529,-103.648 2.316,-103.648 ; -0.529,-103.623 1.884,-103.623 ; -0.529,-103.597 1.148,-103.597 ; -0.529,-103.572 1.021,-103.572 ; -0.529,-103.546 1.021,-103.546 ; -0.529,-99.381 4.069,-99.381 ; -0.529,-99.355 4.12,-99.355 ; -0.529,-97.476 -0.173,-97.476 ; -0.529,-96.13 -0.452,-96.13 ; -0.529,-96.003 2.215,-96.003 ; -0.529,-95.977 2.215,-95.977 ; -0.503,-105.553 2.24,-105.553 ; -0.503,-105.502 2.24,-105.502 ; -0.503,-103.877 2.291,-103.877 ; -0.503,-103.851 2.316,-103.851 ; -0.503,-103.826 2.316,-103.826 ; -0.503,-103.8 2.316,-103.8 ; -0.503,-103.775 2.316,-103.775 ; -0.503,-103.75 2.316,-103.75 ; -0.503,-103.724 2.316,-103.724 ; -0.503,-103.699 2.316,-103.699 ; -0.503,-103.673 2.316,-103.673 ; -0.503,-99.33 4.247,-99.33 ; -0.503,-97.501 -0.173,-97.501 ; -0.478,-105.528 2.24,-105.528 ; -0.478,-99.305 4.221,-99.305 ; -0.478,-99.279 4.17,-99.279 ; -0.478,-97.552 -0.148,-97.552 ; -0.478,-97.527 -0.173,-97.527 ; -0.452,-99.254 4.12,-99.254 ; -0.452,-99.228 4.374,-99.228 ; -0.452,-97.577 -0.148,-97.577 ; -0.427,-99.203 4.196,-99.203 ; -0.427,-99.178 3.967,-99.178 ; -0.427,-97.603 -0.148,-97.603 ; -0.402,-99.152 3.891,-99.152 ; -0.402,-99.127 3.84,-99.127 ; -0.402,-97.628 -0.148,-97.628 ; -0.376,-99.101 3.789,-99.101 ; -0.376,-99.076 3.739,-99.076 ; -0.376,-97.654 -0.122,-97.654 ; -0.351,-99.051 3.688,-99.051 ; -0.351,-99.025 3.637,-99.025 ; -0.351,-99 3.586,-99 ; -0.325,-98.974 3.535,-98.974 ; -0.325,-98.949 3.51,-98.949 ; -0.3,-98.924 3.485,-98.924 ; -0.3,-98.898 3.459,-98.898 ; -0.3,-96.028 2.189,-96.028 ; -0.275,-98.873 3.434,-98.873 ; -0.275,-97.755 -0.173,-97.755 ; -0.275,-97.73 -0.198,-97.73 ; -0.275,-97.704 -0.198,-97.704 ; -0.275,-97.679 -0.122,-97.679 ; -0.249,-98.847 3.383,-98.847 ; -0.249,-97.882 -0.173,-97.882 ; -0.249,-97.857 -0.173,-97.857 ; -0.249,-97.831 -0.173,-97.831 ; -0.249,-97.806 -0.173,-97.806 ; -0.249,-97.781 -0.173,-97.781 ; -0.249,-96.053 2.189,-96.053 ; -0.224,-98.822 3.358,-98.822 ; -0.224,-96.079 2.164,-96.079 ; -0.198,-98.797 3.332,-98.797 ; -0.173,-98.771 3.307,-98.771 ; -0.173,-97.704 -0.122,-97.704 ; -0.173,-97.4 2.392,-97.4 ; -0.173,-96.104 2.164,-96.104 ; -0.148,-98.746 3.281,-98.746 ; -0.148,-98.72 3.256,-98.72 ; -0.122,-98.695 3.231,-98.695 ; -0.122,-98.67 3.205,-98.67 ; -0.122,-97.45 2.418,-97.45 ; -0.122,-97.425 2.392,-97.425 ; -0.122,-96.13 2.138,-96.13 ; -0.097,-98.644 3.18,-98.644 ; -0.097,-98.619 3.18,-98.619 ; -0.097,-98.593 3.154,-98.593 ; -0.097,-97.501 2.418,-97.501 ; -0.097,-97.476 2.418,-97.476 ; -0.097,-96.155 2.138,-96.155 ; -0.071,-98.568 3.129,-98.568 ; -0.071,-98.543 3.129,-98.543 ; -0.071,-98.517 3.104,-98.517 ; -0.071,-98.492 3.104,-98.492 ; -0.071,-98.466 3.078,-98.466 ; -0.071,-97.577 2.443,-97.577 ; -0.071,-97.552 2.443,-97.552 ; -0.071,-97.527 2.418,-97.527 ; -0.071,-96.358 2.088,-96.358 ; -0.071,-96.333 1.961,-96.333 ; -0.071,-96.18 2.164,-96.18 ; -0.046,-98.441 3.053,-98.441 ; -0.046,-98.416 3.053,-98.416 ; -0.046,-98.39 3.027,-98.39 ; -0.046,-97.679 2.545,-97.679 ; -0.046,-97.654 2.519,-97.654 ; -0.046,-97.628 2.443,-97.628 ; -0.046,-97.603 2.443,-97.603 ; -0.046,-96.384 2.062,-96.384 ; -0.046,-96.307 1.935,-96.307 ; -0.046,-96.282 1.935,-96.282 ; -0.046,-96.257 1.935,-96.257 ; -0.046,-96.231 1.91,-96.231 ; -0.046,-96.206 1.91,-96.206 ; -0.021,-98.365 3.027,-98.365 ; -0.021,-98.339 3.027,-98.339 ; -0.021,-97.73 2.519,-97.73 ; -0.021,-97.704 2.519,-97.704 ; -0.021,-96.409 2.062,-96.409 ; 0.005,-98.314 2.977,-98.314 ; 0.005,-98.289 2.875,-98.289 ; 0.005,-98.263 2.824,-98.263 ; 0.005,-98.238 2.799,-98.238 ; 0.005,-98.212 2.799,-98.212 ; 0.005,-98.187 2.773,-98.187 ; 0.005,-97.781 2.494,-97.781 ; 0.005,-97.755 2.519,-97.755 ; 0.03,-98.162 2.748,-98.162 ; 0.03,-98.136 2.748,-98.136 ; 0.03,-98.111 2.723,-98.111 ; 0.03,-98.085 2.723,-98.085 ; 0.03,-98.06 2.723,-98.06 ; 0.03,-98.035 2.723,-98.035 ; 0.03,-98.009 2.748,-98.009 ; 0.03,-97.984 2.748,-97.984 ; 0.03,-97.958 2.748,-97.958 ; 0.03,-97.933 2.723,-97.933 ; 0.03,-97.908 2.672,-97.908 ; 0.03,-97.882 2.57,-97.882 ; 0.03,-97.857 2.519,-97.857 ; 0.03,-97.831 2.519,-97.831 ; 0.03,-97.806 2.494,-97.806 ; 0.03,-96.434 2.062,-96.434 ; 0.056,-96.46 2.392,-96.46 ; 0.081,-96.485 2.392,-96.485 ; 0.106,-96.511 2.392,-96.511 ; 0.132,-96.561 2.418,-96.561 ; 0.132,-96.536 2.392,-96.536 ; 0.157,-96.587 2.265,-96.587 ; 0.183,-96.612 2.265,-96.612 ; 0.208,-96.638 2.265,-96.638 ; 0.233,-96.688 2.291,-96.688 ; 0.233,-96.663 2.265,-96.663 ; 0.259,-96.739 2.291,-96.739 ; 0.259,-96.714 2.291,-96.714 ; 0.284,-96.765 2.291,-96.765 ; 0.31,-96.815 2.291,-96.815 ; 0.31,-96.79 2.291,-96.79 ; 0.335,-96.866 2.291,-96.866 ; 0.335,-96.841 2.291,-96.841 ; 0.36,-97.146 0.411,-97.146 ; 0.36,-96.917 2.164,-96.917 ; 0.36,-96.892 2.189,-96.892 ; 0.386,-96.993 2.164,-96.993 ; 0.386,-96.968 2.164,-96.968 ; 0.386,-96.942 2.164,-96.942 ; 0.411,-97.069 2.392,-97.069 ; 0.411,-97.044 2.392,-97.044 ; 0.411,-97.019 2.215,-97.019 ; 0.437,-97.146 2.469,-97.146 ; 0.437,-97.12 2.469,-97.12 ; 0.437,-97.095 2.418,-97.095 ; 0.462,-97.222 2.443,-97.222 ; 0.462,-97.196 2.469,-97.196 ; 0.462,-97.171 2.469,-97.171 ; 1.072,-103.013 16.464,-103.013 ; 1.249,-104.181 2.291,-104.181 ; 1.783,-103.038 16.464,-103.038 ; 1.961,-104.207 2.291,-104.207 ; 1.961,-96.206 2.164,-96.206 ; 1.986,-96.333 2.113,-96.333 ; 2.011,-96.307 2.392,-96.307 ; 2.011,-96.282 2.392,-96.282 ; 2.011,-96.257 2.418,-96.257 ; 2.011,-96.231 2.189,-96.231 ; 2.088,-96.434 2.392,-96.434 ; 2.113,-96.409 2.392,-96.409 ; 2.113,-96.384 2.392,-96.384 ; 2.138,-96.358 2.392,-96.358 ; 2.138,-96.333 2.392,-96.333 ; 2.215,-96.231 2.316,-96.231 ; 2.24,-96.206 2.316,-96.206 ; 2.265,-97.019 2.392,-97.019 ; 2.265,-96.18 2.316,-96.18 ; 2.265,-96.155 2.316,-96.155 ; 2.291,-96.993 2.418,-96.993 ; 2.291,-96.968 2.418,-96.968 ; 2.291,-96.13 2.342,-96.13 ; 2.291,-96.104 2.367,-96.104 ; 2.316,-96.942 2.418,-96.942 ; 2.316,-96.917 2.418,-96.917 ; 2.316,-96.892 2.443,-96.892 ; 2.316,-96.587 2.418,-96.587 ; 2.316,-96.079 2.392,-96.079 ; 2.316,-96.053 2.418,-96.053 ; 2.342,-96.866 2.443,-96.866 ; 2.342,-96.841 2.443,-96.841 ; 2.342,-96.663 2.469,-96.663 ; 2.342,-96.638 2.469,-96.638 ; 2.342,-96.612 2.443,-96.612 ; 2.342,-96.231 2.418,-96.231 ; 2.342,-96.206 2.418,-96.206 ; 2.342,-96.028 2.596,-96.028 ; 2.342,-96.003 2.596,-96.003 ; 2.367,-96.815 2.443,-96.815 ; 2.367,-96.79 2.469,-96.79 ; 2.367,-96.765 2.469,-96.765 ; 2.367,-96.739 2.469,-96.739 ; 2.367,-96.714 2.469,-96.714 ; 2.367,-96.688 2.469,-96.688 ; 2.367,-96.18 2.443,-96.18 ; 2.367,-95.977 2.596,-95.977 ; 2.367,-95.952 2.596,-95.952 ; 2.367,-95.926 2.596,-95.926 ; 2.392,-96.155 2.443,-96.155 ; 2.392,-96.13 2.469,-96.13 ; 2.392,-95.901 2.596,-95.901 ; 2.392,-95.876 2.596,-95.876 ; 2.418,-96.104 2.469,-96.104 ; 2.418,-96.079 2.57,-96.079 ; 2.418,-95.85 2.596,-95.85 ; 2.418,-95.495 2.519,-95.495 ; 2.443,-97.095 2.469,-97.095 ; 2.443,-97.069 2.469,-97.069 ; 2.443,-96.053 2.596,-96.053 ; 2.443,-95.825 2.596,-95.825 ; 2.443,-95.799 2.596,-95.799 ; 2.443,-95.647 2.469,-95.647 ; 2.469,-95.774 2.596,-95.774 ; 2.469,-95.52 2.494,-95.52 ; 2.494,-95.749 2.57,-95.749 ; 2.519,-103.064 16.464,-103.064 ; 2.85,-105.909 4.145,-105.909 ; 2.85,-105.883 4.094,-105.883 ; 2.875,-105.858 4.043,-105.858 ; 2.875,-105.832 4.018,-105.832 ; 2.875,-105.807 3.967,-105.807 ; 2.875,-105.782 3.942,-105.782 ; 2.875,-105.756 3.891,-105.756 ; 2.875,-105.731 3.866,-105.731 ; 2.875,-105.705 3.84,-105.705 ; 2.875,-105.68 3.815,-105.68 ; 2.875,-105.655 3.789,-105.655 ; 2.875,-105.629 3.764,-105.629 ; 2.875,-105.604 3.739,-105.604 ; 2.875,-105.578 3.713,-105.578 ; 2.875,-105.553 3.688,-105.553 ; 2.875,-105.528 3.662,-105.528 ; 2.875,-105.502 3.637,-105.502 ; 2.875,-105.477 3.637,-105.477 ; 2.875,-105.451 3.612,-105.451 ; 2.875,-105.426 3.586,-105.426 ; 2.875,-105.401 3.586,-105.401 ; 2.875,-105.375 3.561,-105.375 ; 2.875,-105.35 3.561,-105.35 ; 2.875,-105.324 3.535,-105.324 ; 2.875,-105.299 3.51,-105.299 ; 2.875,-105.274 3.51,-105.274 ; 2.875,-105.248 3.51,-105.248 ; 2.875,-105.223 3.485,-105.223 ; 2.875,-105.197 3.485,-105.197 ; 2.875,-105.172 3.459,-105.172 ; 2.9,-105.147 3.459,-105.147 ; 2.9,-105.121 3.434,-105.121 ; 2.9,-105.096 3.434,-105.096 ; 2.9,-105.07 3.434,-105.07 ; 2.9,-105.045 3.434,-105.045 ; 2.9,-105.02 3.408,-105.02 ; 2.9,-104.994 3.408,-104.994 ; 2.9,-104.969 3.408,-104.969 ; 2.9,-104.943 3.408,-104.943 ; 2.9,-104.918 3.383,-104.918 ; 2.9,-104.893 3.383,-104.893 ; 2.9,-104.867 3.383,-104.867 ; 2.9,-104.842 3.383,-104.842 ; 2.9,-104.816 3.383,-104.816 ; 2.9,-104.791 3.383,-104.791 ; 2.9,-104.766 3.358,-104.766 ; 2.9,-104.74 3.358,-104.74 ; 2.9,-104.715 3.358,-104.715 ; 2.9,-104.689 3.358,-104.689 ; 2.9,-104.664 3.358,-104.664 ; 2.9,-104.639 3.358,-104.639 ; 2.9,-104.613 3.358,-104.613 ; 2.9,-104.588 3.358,-104.588 ; 2.9,-104.562 3.358,-104.562 ; 2.9,-104.537 3.358,-104.537 ; 2.9,-104.512 3.358,-104.512 ; 2.9,-104.486 3.358,-104.486 ; 2.9,-104.461 3.358,-104.461 ; 2.9,-104.435 3.358,-104.435 ; 2.926,-104.41 3.383,-104.41 ; 2.926,-104.385 3.383,-104.385 ; 2.926,-104.359 3.383,-104.359 ; 2.926,-104.334 3.383,-104.334 ; 2.926,-104.308 3.383,-104.308 ; 2.926,-104.283 3.383,-104.283 ; 2.926,-104.258 3.383,-104.258 ; 2.926,-104.232 3.383,-104.232 ; 2.926,-104.207 3.408,-104.207 ; 2.926,-104.181 3.408,-104.181 ; 2.926,-104.156 3.408,-104.156 ; 2.926,-104.131 3.408,-104.131 ; 2.926,-104.105 3.434,-104.105 ; 2.926,-104.08 3.434,-104.08 ; 2.926,-104.054 3.434,-104.054 ; 2.926,-104.029 3.459,-104.029 ; 2.926,-104.004 3.459,-104.004 ; 2.926,-103.978 3.459,-103.978 ; 2.926,-103.953 3.485,-103.953 ; 2.926,-103.927 3.485,-103.927 ; 2.926,-103.902 3.51,-103.902 ; 2.926,-103.877 3.51,-103.877 ; 2.926,-103.851 3.535,-103.851 ; 2.926,-103.826 3.535,-103.826 ; 2.926,-103.8 3.561,-103.8 ; 2.926,-103.775 3.561,-103.775 ; 2.926,-103.75 3.586,-103.75 ; 2.926,-103.724 3.586,-103.724 ; 2.926,-103.699 3.612,-103.699 ; 2.951,-103.673 3.637,-103.673 ; 2.951,-103.648 3.637,-103.648 ; 2.951,-103.623 3.662,-103.623 ; 2.951,-103.597 3.688,-103.597 ; 2.951,-103.572 3.713,-103.572 ; 2.951,-103.546 3.739,-103.546 ; 2.951,-103.521 3.764,-103.521 ; 2.951,-103.496 3.789,-103.496 ; 2.951,-103.47 3.815,-103.47 ; 2.951,-103.445 3.84,-103.445 ; 2.951,-103.419 3.866,-103.419 ; 2.951,-103.394 3.891,-103.394 ; 2.951,-103.369 3.916,-103.369 ; 2.951,-103.343 3.967,-103.343 ; 2.951,-103.318 3.993,-103.318 ; 2.951,-103.292 4.043,-103.292 ; 2.951,-103.267 4.094,-103.267 ; 2.951,-103.242 4.145,-103.242 ; 2.951,-103.216 4.196,-103.216 ; 2.951,-103.191 4.247,-103.191 ; 2.951,-103.165 4.323,-103.165 ; 2.951,-103.14 4.399,-103.14 ; 2.951,-103.115 4.501,-103.115 ; 2.951,-103.089 4.653,-103.089 ; 3.942,-94.225 4.678,-94.225 ; 3.967,-94.25 4.653,-94.25 ; 3.993,-94.275 4.628,-94.275 ; 4.018,-104.766 5.771,-104.766 ; 4.018,-104.74 5.771,-104.74 ; 4.018,-104.715 5.771,-104.715 ; 4.018,-104.689 5.771,-104.689 ; 4.018,-104.664 5.796,-104.664 ; 4.018,-104.639 5.796,-104.639 ; 4.018,-104.613 5.796,-104.613 ; 4.018,-104.588 5.796,-104.588 ; 4.018,-104.562 5.796,-104.562 ; 4.018,-104.537 5.796,-104.537 ; 4.018,-104.512 5.796,-104.512 ; 4.018,-104.486 5.796,-104.486 ; 4.018,-104.461 5.796,-104.461 ; 4.018,-104.435 5.771,-104.435 ; 4.018,-104.41 5.771,-104.41 ; 4.043,-104.867 5.745,-104.867 ; 4.043,-104.842 5.745,-104.842 ; 4.043,-104.816 5.771,-104.816 ; 4.043,-104.791 5.771,-104.791 ; 4.043,-104.385 5.771,-104.385 ; 4.043,-104.359 5.771,-104.359 ; 4.043,-104.334 5.771,-104.334 ; 4.043,-104.308 5.771,-104.308 ; 4.043,-104.283 5.745,-104.283 ; 4.069,-104.943 5.72,-104.943 ; 4.069,-104.918 5.745,-104.918 ; 4.069,-104.893 5.745,-104.893 ; 4.069,-104.258 5.745,-104.258 ; 4.069,-104.232 5.745,-104.232 ; 4.069,-104.207 5.72,-104.207 ; 4.069,-94.301 4.628,-94.301 ; 4.094,-104.994 5.694,-104.994 ; 4.094,-104.969 5.72,-104.969 ; 4.094,-104.181 5.72,-104.181 ; 4.094,-104.156 5.694,-104.156 ; 4.12,-105.045 5.669,-105.045 ; 4.12,-105.02 5.694,-105.02 ; 4.12,-104.131 5.694,-104.131 ; 4.12,-104.105 5.694,-104.105 ; 4.145,-105.096 5.644,-105.096 ; 4.145,-105.07 5.669,-105.07 ; 4.145,-104.08 5.669,-104.08 ; 4.145,-104.054 5.644,-104.054 ; 4.17,-105.147 5.618,-105.147 ; 4.17,-105.121 5.644,-105.121 ; 4.17,-104.029 5.644,-104.029 ; 4.196,-105.172 5.593,-105.172 ; 4.196,-104.004 5.618,-104.004 ; 4.196,-103.978 5.593,-103.978 ; 4.221,-105.197 5.567,-105.197 ; 4.221,-103.953 5.593,-103.953 ; 4.247,-105.223 5.567,-105.223 ; 4.247,-103.927 5.567,-103.927 ; 4.272,-105.248 5.542,-105.248 ; 4.272,-103.902 5.542,-103.902 ; 4.297,-105.274 5.517,-105.274 ; 4.297,-103.877 5.517,-103.877 ; 4.297,-99.254 4.602,-99.254 ; 4.323,-105.299 5.466,-105.299 ; 4.323,-103.851 5.466,-103.851 ; 4.323,-94.402 4.475,-94.402 ; 4.323,-94.377 4.653,-94.377 ; 4.323,-94.352 4.678,-94.352 ; 4.323,-94.326 4.653,-94.326 ; 4.348,-105.324 5.44,-105.324 ; 4.348,-103.826 5.44,-103.826 ; 4.374,-94.428 4.399,-94.428 ; 4.399,-105.35 5.415,-105.35 ; 4.399,-103.8 5.415,-103.8 ; 4.424,-105.375 5.364,-105.375 ; 4.45,-103.775 5.364,-103.775 ; 4.475,-105.401 5.313,-105.401 ; 4.475,-103.75 5.313,-103.75 ; 4.501,-96.968 12.679,-96.968 ; 4.501,-96.942 12.654,-96.942 ; 4.501,-96.917 12.654,-96.917 ; 4.501,-96.892 12.679,-96.892 ; 4.501,-96.866 12.527,-96.866 ; 4.501,-96.841 12.476,-96.841 ; 4.526,-97.069 12.781,-97.069 ; 4.526,-97.044 12.756,-97.044 ; 4.526,-97.019 12.73,-97.019 ; 4.526,-96.993 12.679,-96.993 ; 4.526,-96.815 12.451,-96.815 ; 4.526,-96.79 12.4,-96.79 ; 4.526,-96.765 12.375,-96.765 ; 4.526,-94.428 4.602,-94.428 ; 4.526,-94.402 4.653,-94.402 ; 4.551,-105.426 5.263,-105.426 ; 4.551,-103.724 5.263,-103.724 ; 4.551,-99.406 6.685,-99.406 ; 4.551,-97.12 12.857,-97.12 ; 4.551,-97.095 12.806,-97.095 ; 4.551,-96.739 12.349,-96.739 ; 4.551,-96.714 12.298,-96.714 ; 4.551,-96.688 12.273,-96.688 ; 4.577,-97.171 12.933,-97.171 ; 4.577,-97.146 12.883,-97.146 ; 4.577,-96.663 12.222,-96.663 ; 4.577,-96.638 12.197,-96.638 ; 4.577,-96.612 12.171,-96.612 ; 4.577,-96.587 12.121,-96.587 ; 4.602,-105.451 5.186,-105.451 ; 4.602,-103.699 5.186,-103.699 ; 4.602,-97.222 6.66,-97.222 ; 4.602,-97.196 6.761,-97.196 ; 4.602,-96.561 12.095,-96.561 ; 4.628,-97.273 6.431,-97.273 ; 4.628,-97.247 6.533,-97.247 ; 4.628,-96.536 12.07,-96.536 ; 4.653,-97.349 6.101,-97.349 ; 4.653,-97.323 6.202,-97.323 ; 4.653,-97.298 6.304,-97.298 ; 4.653,-96.511 12.019,-96.511 ; 4.653,-96.485 11.994,-96.485 ; 4.653,-96.46 11.968,-96.46 ; 4.653,-96.434 11.917,-96.434 ; 4.653,-96.409 11.892,-96.409 ; 4.653,-96.384 11.867,-96.384 ; 4.678,-97.476 4.932,-97.476 ; 4.678,-97.45 4.932,-97.45 ; 4.678,-97.425 4.932,-97.425 ; 4.678,-97.4 5.872,-97.4 ; 4.678,-97.374 5.999,-97.374 ; 4.678,-96.358 11.841,-96.358 ; 4.678,-96.333 11.816,-96.333 ; 4.678,-96.307 11.79,-96.307 ; 4.704,-105.477 5.085,-105.477 ; 4.704,-103.673 5.085,-103.673 ; 4.704,-96.282 11.765,-96.282 ; 4.704,-96.257 11.74,-96.257 ; 4.729,-96.231 11.714,-96.231 ; 4.755,-93.869 5.796,-93.869 ; 4.78,-99.381 6.685,-99.381 ; 4.78,-96.206 11.689,-96.206 ; 4.805,-97.501 4.932,-97.501 ; 4.805,-96.18 11.663,-96.18 ; 4.831,-99.355 6.66,-99.355 ; 4.856,-96.155 11.638,-96.155 ; 4.882,-99.33 4.983,-99.33 ; 4.907,-99.305 4.958,-99.305 ; 4.907,-96.13 11.613,-96.13 ; 4.932,-96.104 11.587,-96.104 ; 4.958,-96.079 11.562,-96.079 ; 4.983,-97.425 5.771,-97.425 ; 4.983,-96.053 11.562,-96.053 ; 5.009,-99.33 6.66,-99.33 ; 5.009,-97.476 5.644,-97.476 ; 5.009,-97.45 5.644,-97.45 ; 5.009,-96.028 11.536,-96.028 ; 5.034,-99.305 6.66,-99.305 ; 5.034,-97.501 5.644,-97.501 ; 5.034,-96.003 11.511,-96.003 ; 5.059,-95.977 11.486,-95.977 ; 5.085,-99.279 6.634,-99.279 ; 5.085,-97.527 5.644,-97.527 ; 5.11,-103.089 16.464,-103.089 ; 5.11,-99.254 6.66,-99.254 ; 5.11,-97.552 5.644,-97.552 ; 5.11,-95.952 11.46,-95.952 ; 5.11,-94.047 5.44,-94.047 ; 5.136,-93.92 5.72,-93.92 ; 5.161,-106.061 6.583,-106.061 ; 5.161,-95.926 11.46,-95.926 ; 5.161,-93.945 5.694,-93.945 ; 5.186,-99.228 6.685,-99.228 ; 5.186,-97.577 5.44,-97.577 ; 5.186,-95.901 11.435,-95.901 ; 5.212,-94.072 5.39,-94.072 ; 5.237,-95.876 11.409,-95.876 ; 5.263,-99.203 6.736,-99.203 ; 5.263,-97.603 5.39,-97.603 ; 5.288,-103.115 16.464,-103.115 ; 5.288,-99.178 6.964,-99.178 ; 5.288,-95.85 11.409,-95.85 ; 5.313,-106.036 6.583,-106.036 ; 5.339,-99.152 6.964,-99.152 ; 5.339,-95.825 11.384,-95.825 ; 5.364,-99.127 6.964,-99.127 ; 5.39,-106.01 6.583,-106.01 ; 5.39,-103.14 16.464,-103.14 ; 5.39,-99.101 6.99,-99.101 ; 5.39,-95.799 11.359,-95.799 ; 5.415,-99.076 6.99,-99.076 ; 5.44,-99.051 7.015,-99.051 ; 5.466,-103.165 16.464,-103.165 ; 5.466,-99.025 7.015,-99.025 ; 5.466,-95.774 11.359,-95.774 ; 5.491,-105.985 6.609,-105.985 ; 5.491,-99 7.041,-99 ; 5.517,-98.974 7.041,-98.974 ; 5.517,-95.749 11.333,-95.749 ; 5.542,-105.959 6.634,-105.959 ; 5.542,-103.191 16.464,-103.191 ; 5.567,-98.949 7.066,-98.949 ; 5.593,-103.216 16.464,-103.216 ; 5.593,-98.924 7.091,-98.924 ; 5.593,-95.723 11.308,-95.723 ; 5.618,-105.934 6.634,-105.934 ; 5.618,-98.898 7.142,-98.898 ; 5.644,-103.242 16.464,-103.242 ; 5.644,-98.873 13.721,-98.873 ; 5.669,-105.909 6.66,-105.909 ; 5.669,-98.847 13.721,-98.847 ; 5.669,-95.698 11.308,-95.698 ; 5.694,-103.267 7.498,-103.267 ; 5.694,-98.822 13.695,-98.822 ; 5.72,-105.883 6.685,-105.883 ; 5.72,-98.797 13.695,-98.797 ; 5.745,-103.292 7.371,-103.292 ; 5.745,-98.771 13.695,-98.771 ; 5.745,-98.746 13.695,-98.746 ; 5.771,-105.858 6.685,-105.858 ; 5.771,-95.672 11.282,-95.672 ; 5.796,-105.832 6.71,-105.832 ; 5.796,-103.318 7.269,-103.318 ; 5.796,-98.72 13.695,-98.72 ; 5.821,-103.343 7.218,-103.343 ; 5.821,-98.695 13.695,-98.695 ; 5.821,-93.793 6.075,-93.793 ; 5.847,-105.807 6.736,-105.807 ; 5.847,-98.67 13.695,-98.67 ; 5.872,-105.782 6.736,-105.782 ; 5.872,-103.369 7.142,-103.369 ; 5.872,-98.644 13.695,-98.644 ; 5.898,-105.756 6.761,-105.756 ; 5.898,-103.394 7.117,-103.394 ; 5.898,-98.619 13.695,-98.619 ; 5.923,-103.419 7.066,-103.419 ; 5.923,-98.593 13.695,-98.593 ; 5.948,-105.731 6.787,-105.731 ; 5.948,-98.568 13.467,-98.568 ; 5.974,-105.705 6.787,-105.705 ; 5.974,-103.445 7.041,-103.445 ; 5.974,-98.543 13.467,-98.543 ; 5.974,-93.869 6.025,-93.869 ; 5.999,-105.68 6.812,-105.68 ; 5.999,-103.47 6.99,-103.47 ; 5.999,-98.517 13.492,-98.517 ; 6.025,-105.655 6.837,-105.655 ; 6.025,-103.496 6.964,-103.496 ; 6.025,-98.492 13.518,-98.492 ; 6.05,-105.629 6.837,-105.629 ; 6.05,-103.521 6.939,-103.521 ; 6.05,-98.466 13.543,-98.466 ; 6.075,-105.604 6.863,-105.604 ; 6.075,-103.546 6.914,-103.546 ; 6.075,-98.441 13.594,-98.441 ; 6.075,-98.416 13.619,-98.416 ; 6.101,-105.578 6.863,-105.578 ; 6.101,-103.572 6.914,-103.572 ; 6.101,-98.39 13.645,-98.39 ; 6.101,-93.59 7.269,-93.59 ; 6.126,-105.553 6.888,-105.553 ; 6.126,-105.528 6.914,-105.528 ; 6.126,-103.623 6.863,-103.623 ; 6.126,-103.597 6.888,-103.597 ; 6.126,-98.365 13.67,-98.365 ; 6.126,-98.339 13.67,-98.339 ; 6.126,-93.64 7.066,-93.64 ; 6.126,-93.615 7.244,-93.615 ; 6.152,-105.502 6.914,-105.502 ; 6.152,-103.648 6.863,-103.648 ; 6.152,-98.314 13.695,-98.314 ; 6.152,-93.691 6.228,-93.691 ; 6.152,-93.666 7.066,-93.666 ; 6.177,-105.477 6.939,-105.477 ; 6.177,-103.673 6.837,-103.673 ; 6.177,-98.289 13.695,-98.289 ; 6.202,-105.451 6.964,-105.451 ; 6.202,-105.426 6.964,-105.426 ; 6.202,-103.724 6.812,-103.724 ; 6.202,-103.699 6.812,-103.699 ; 6.202,-98.263 13.721,-98.263 ; 6.202,-93.717 6.228,-93.717 ; 6.228,-105.401 6.99,-105.401 ; 6.228,-105.375 7.015,-105.375 ; 6.228,-103.775 6.787,-103.775 ; 6.228,-103.75 6.812,-103.75 ; 6.228,-98.238 13.721,-98.238 ; 6.253,-105.35 7.015,-105.35 ; 6.253,-105.324 7.041,-105.324 ; 6.253,-103.8 6.787,-103.8 ; 6.253,-98.212 13.721,-98.212 ; 6.279,-105.299 7.066,-105.299 ; 6.279,-105.274 7.066,-105.274 ; 6.279,-103.851 6.761,-103.851 ; 6.279,-103.826 6.787,-103.826 ; 6.279,-98.187 13.746,-98.187 ; 6.279,-93.691 6.431,-93.691 ; 6.304,-105.248 7.091,-105.248 ; 6.304,-105.223 7.117,-105.223 ; 6.304,-103.927 6.761,-103.927 ; 6.304,-103.902 6.761,-103.902 ; 6.304,-103.877 6.761,-103.877 ; 6.304,-98.162 13.746,-98.162 ; 6.304,-93.717 6.431,-93.717 ; 6.329,-105.197 7.117,-105.197 ; 6.329,-105.172 7.142,-105.172 ; 6.329,-103.978 6.736,-103.978 ; 6.329,-103.953 6.761,-103.953 ; 6.329,-98.136 13.746,-98.136 ; 6.329,-93.742 6.431,-93.742 ; 6.355,-105.147 7.168,-105.147 ; 6.355,-105.121 7.168,-105.121 ; 6.355,-105.096 7.193,-105.096 ; 6.355,-104.054 6.736,-104.054 ; 6.355,-104.029 6.736,-104.029 ; 6.355,-104.004 6.736,-104.004 ; 6.355,-98.111 13.721,-98.111 ; 6.355,-93.767 6.406,-93.767 ; 6.38,-105.07 7.218,-105.07 ; 6.38,-105.045 7.218,-105.045 ; 6.38,-105.02 7.244,-105.02 ; 6.38,-104.994 7.244,-104.994 ; 6.38,-104.131 6.736,-104.131 ; 6.38,-104.105 6.736,-104.105 ; 6.38,-104.08 6.736,-104.08 ; 6.38,-98.085 13.721,-98.085 ; 6.406,-104.969 7.269,-104.969 ; 6.406,-104.943 7.295,-104.943 ; 6.406,-104.918 7.295,-104.918 ; 6.406,-104.893 7.32,-104.893 ; 6.406,-104.867 7.269,-104.867 ; 6.406,-104.258 6.761,-104.258 ; 6.406,-104.232 6.736,-104.232 ; 6.406,-104.207 6.736,-104.207 ; 6.406,-104.181 6.736,-104.181 ; 6.406,-104.156 6.736,-104.156 ; 6.406,-98.06 13.721,-98.06 ; 6.431,-104.842 7.193,-104.842 ; 6.431,-104.816 7.142,-104.816 ; 6.431,-104.791 7.091,-104.791 ; 6.431,-104.766 7.041,-104.766 ; 6.431,-104.74 7.015,-104.74 ; 6.431,-104.715 6.99,-104.715 ; 6.431,-104.689 6.964,-104.689 ; 6.431,-104.664 6.939,-104.664 ; 6.431,-104.639 6.914,-104.639 ; 6.431,-104.613 6.888,-104.613 ; 6.431,-104.588 6.863,-104.588 ; 6.431,-104.562 6.863,-104.562 ; 6.431,-104.537 6.837,-104.537 ; 6.431,-104.512 6.837,-104.512 ; 6.431,-104.486 6.812,-104.486 ; 6.431,-104.461 6.812,-104.461 ; 6.431,-104.435 6.787,-104.435 ; 6.431,-104.41 6.787,-104.41 ; 6.431,-104.385 6.787,-104.385 ; 6.431,-104.359 6.761,-104.359 ; 6.431,-104.334 6.761,-104.334 ; 6.431,-104.308 6.761,-104.308 ; 6.431,-104.283 6.761,-104.283